# EAGLE board InteractionBoard_HallEffect (EAGLE 9.7.0)
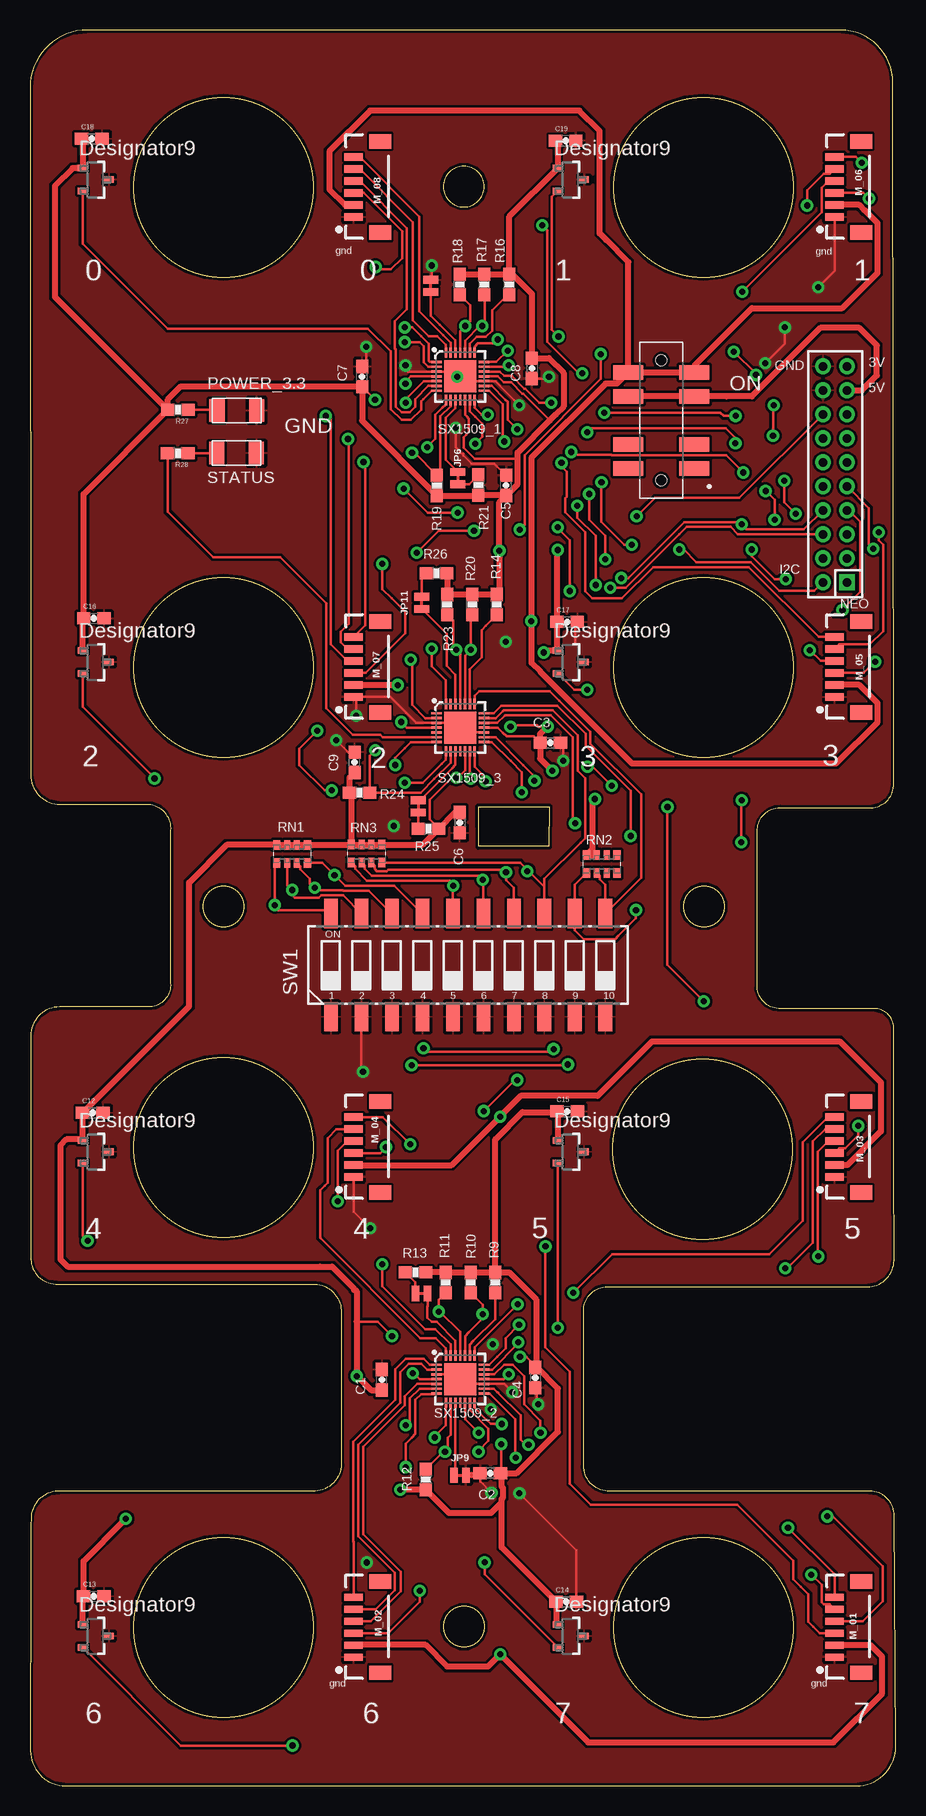
[diagram p0: board, top side]
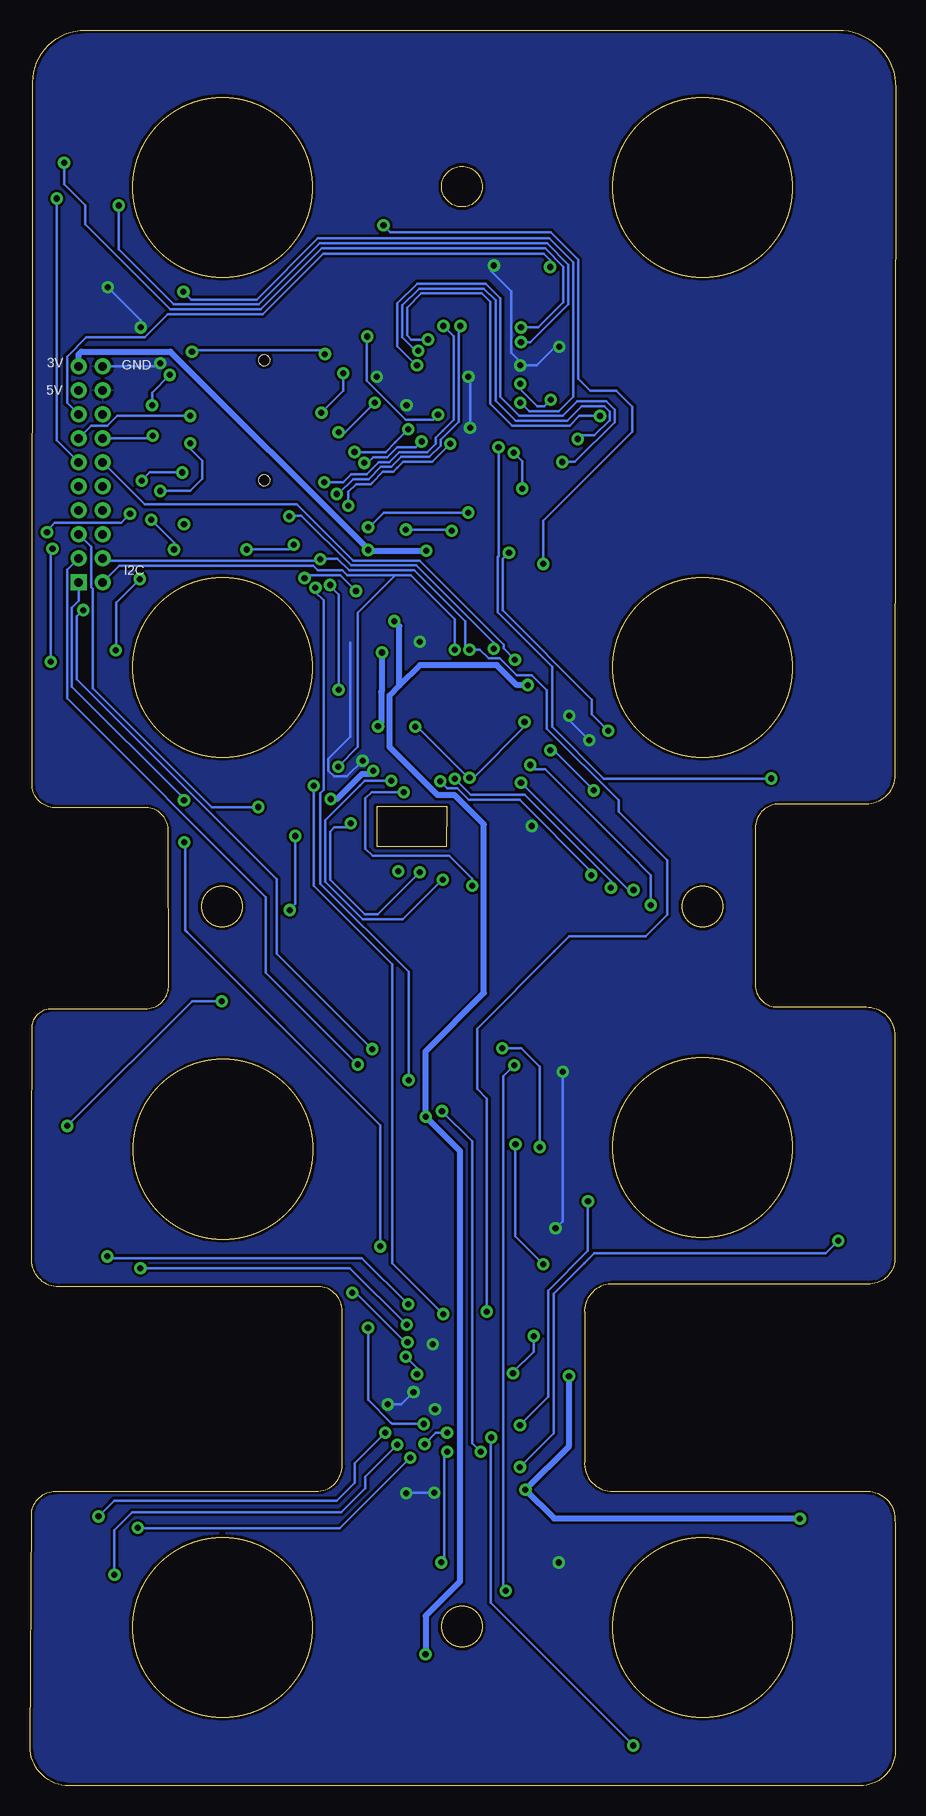
[diagram p1: board, bottom side, seen from below]

Size 72.14 x 146.32 mm. Coordinates in mm from the lower left corner, seen from the top.
Outline: 43.23,78.29 37.39,78.28 37.37,81.58 43.26,81.59 43.23,78.29
Outline: 71.97,63.21 arc87 70.33,64.77 62.38,64.77 arc-90 60.59,66.74 60.6,79.52 arc-90 62.48,81.52 70.1,81.51 arc90 71.96,83.5 71.9,141.95 arc90 67.53,146.32 4.8,146.32 arc90 0,141.51 0.06,84.23 arc90 2.49,81.8 9.88,81.8 arc-90 11.7,79.61 11.7,66.9 arc-90 10.02,64.9 2.46,64.9 arc90 0.06,62.5 0.06,43.87 arc90 2.34,41.81 23.74,41.81 arc-90 25.93,39.41 25.93,27.03 arc-90 23.77,24.54 2.57,24.54 arc88 0.09,22.48 0.05,21.53 0.05,10.47 0.03,10.09 0.03,2.92 arc90 2.96,0 68.89,0.01 arc90 72.14,3.28 72.01,22.7 arc90 69.81,24.54 48.12,24.54 arc-90 46.13,26.89 46.13,39.58 arc-90 48.11,41.58 69.76,41.58 arc90 72,43.79 72,47.47 71.99,47.79 71.99,52.59 71.98,52.95 71.98,57.82 71.97,58.14 71.97,63.21
Outline: 36.15,131.57 arc180 36.15,134.97 arc180 36.15,131.57
Outline: circle at 16.12,73.26 radius 1.7
Outline: circle at 36.16,13.27 radius 1.7
Outline: circle at 56.16,73.28 radius 1.7
Outline: circle at 16.12,13.2 radius 7.49
Outline: circle at 16.12,53.2 radius 7.49
Outline: circle at 16.12,133.2 radius 7.49
Outline: circle at 56.12,93.2 radius 7.49
Outline: circle at 56.12,133.2 radius 7.49
Outline: circle at 56.05,53.04 radius 7.49
Outline: circle at 16.12,93.2 radius 7.49
Outline: circle at 56.12,13.2 radius 7.49
Copper layers (1*16): Top / Bottom
Stack-up Default Layer Stack: Top User Defined 0.035mm / Dielectric-1 User Defined 1.5mm / Bottom User Defined 0.035mm
Design rules "SparkFun *": minimum track width 8mil, minimum drill 20mil, track to track 8mil, track to pad 8mil, pad to pad 8mil, via to via 8mil, smd to smd 8mil, copper to edge 10mil, drill to drill 8mil, minimum pad ring 12mil, minimum via ring 10mil, stop-mask expansion 4mil, vias tented up to drill 25mil, thermal gap 10mil
Net classes: 0 default: width 0.2 mm, clearance 0.2 mm; 1 gnd: width 0.3 mm, clearance 0.2 mm to class 0, clearance 0.2 mm; 2 3v: width 0.2 mm, clearance 0.2 mm; 4 5v: width 0.4 mm, clearance 0.2 mm to class 0, clearance 0.2 mm

## Footprints (pad centres in the part's own frame; a part is rotated, then mirrored left to right if it is on the bottom)
0603-CAP = smd 1.1 x 1: 1 -0.85,0; 2 0.85,0
DIL-2MM-2X10 = drill 0.711 square: 1 -9,-1 | drill 0.711: 2 -9,1; 3 -7,-1; 4 -7,1; 5 -5,-1; 6 -5,1; 7 -3,-1; 8 -3,1; 9 -1,-1; 10 -1,1; 11 1,-1; 12 1,1; 13 3,-1; 14 3,1; 15 5,-1; 16 5,1; 17 7,-1; 18 7,1; 19 9,-1; 20 9,1
SMT-JUMPER_2_NC_TRACE_NO-SILK = smd 0.635 x 1.27: 1 -0.508,0; 2 0.508,0
1X06-1MM = smd 0.6 x 1.55: 1 -2.54,1.27; 2 -1.54,1.27; 3 -0.54,1.27; 4 0.46,1.27; 5 1.46,1.27; 6 2.46,1.27 | smd 1.2 x 1.8: P$1 -3.84,-0.955; P$2 3.76,-0.955
LED1206FAB = smd 1.27 x 1.905: 1 -1.651,0; 2 1.651,0
0603-RES = smd 1.1 x 1: 1 -0.85,0; 2 0.85,0
EXB38V = smd 0.6 x 0.8: 1 -1.275,-0.75; 4 1.275,-0.75; 5 1.275,0.75; 8 -1.275,0.75 | smd 0.5 x 0.8: 2 -0.4,-0.75; 3 0.4,-0.75; 6 0.4,0.75; 7 -0.4,0.75
SW_JS207011SCQNR = smd 2.5 x 1.2: 1 -2.75,4; 2 -2.75,2; 3 -2.75,-2; 4 -2.75,-4; 5 2.75,4; 6 2.75,2; 7 2.75,-2; 8 2.75,-4 | hole 0.9: 0,5; 0,-5
CTS-219-10 = smd 1.13 x 2.44: 1 -11.43,-4.3; 2 -8.89,-4.3; 3 -6.35,-4.3; 4 -3.81,-4.3; 5 -1.27,-4.3; 6 1.27,-4.3; 7 3.81,-4.3; 8 6.35,-4.3; 9 8.89,-4.3; 10 11.43,-4.3; 11 11.43,4.3; 12 8.89,4.3; 13 6.35,4.3; 14 3.81,4.3; 15 1.27,4.3; 16 -1.27,4.3; 17 -3.81,4.3; 18 -6.35,4.3; 19 -8.89,4.3; 20 -11.43,4.3
QFN-28 = smd 0.85 x 0.2: 1 -1.975,1.2; 2 -1.975,0.8; 3 -1.975,0.4; 4 -1.975,0; 5 -1.975,-0.4; 6 -1.975,-0.8; 7 -1.975,-1.2; 15 1.975,-1.2; 16 1.975,-0.8; 17 1.975,-0.4; 18 1.975,0; 19 1.975,0.4; 20 1.975,0.8; 21 1.975,1.2 | smd 0.2 x 0.85: 8 -1.2,-1.975; 9 -0.8,-1.975; 10 -0.4,-1.975; 11 0,-1.975; 12 0.4,-1.975; 13 0.8,-1.975; 14 1.2,-1.975; 22 1.2,1.975; 23 0.8,1.975; 24 0.4,1.975; 25 0,1.975; 26 -0.4,1.975; 27 -0.8,1.975; 28 -1.2,1.975 | smd 2.65 x 2.65: 29 0,0
DBZ0003A_L = smd 0.8 x 0.55: 1 -1.1,0.95; 2 -1.1,-0.95; 3 1.1,0

## Placement (x,y rotation side)
C1  0.1uF  [0603-CAP]  29.32,33.83 90 top
C2  0.1uF  [0603-CAP]  38.35,26.05 180 top
C3  0.1uF  [0603-CAP]  43.36,86.91 0 top
C4  0.1uF  [0603-CAP]  42.11,34.01 270 top
C5  0.1uF  [0603-CAP]  39.67,108.37 90 top
C6  0.1uF  [0603-CAP]  35.8,80.26 270 top
C7  0.1uF  [0603-CAP]  27.68,117.43 90 top
C8  0.1uF  [0603-CAP]  41.83,118.12 270 top
C9  0.1uF  [0603-CAP]  27.05,85.29 90 top
C12  0.1uF  [0603-CAP]  5.23,56.09 0 top
C13  0.1uF  [0603-CAP]  5.31,15.79 0 top
C14  0.1uF  [0603-CAP]  44.69,15.33 0 top
C15  0.1uF  [0603-CAP]  44.77,56.19 0 top
C16  0.1uF  [0603-CAP]  5.32,97.29 0 top
C17  0.1uF  [0603-CAP]  44.76,96.99 0 top
C18  0.1uF  [0603-CAP]  5.14,137.25 0 top
C19  0.1uF  [0603-CAP]  44.64,137.09 0 top
J3  F-2X10-DIL-2MM  [DIL-2MM-2X10]  67.08,109.29 90 top
JP6  JUMPER-SMT_2_NC_TRACE_NO-SILK  [SMT-JUMPER_2_NC_TRACE_NO-SILK]  35.65,108.97 270 top
JP7  JUMPER-SMT_2_NC_TRACE_NO-SILK  [SMT-JUMPER_2_NC_TRACE_NO-SILK]  33.39,125 90 top
JP8  JUMPER-SMT_2_NC_TRACE_NO-SILK  [SMT-JUMPER_2_NC_TRACE_NO-SILK]  32.62,41.02 180 top
JP9  JUMPER-SMT_2_NC_TRACE_NO-SILK  [SMT-JUMPER_2_NC_TRACE_NO-SILK]  35.84,25.88 0 top
JP10  JUMPER-SMT_2_NC_TRACE_NO-SILK  [SMT-JUMPER_2_NC_TRACE_NO-SILK]  32.36,81.62 270 top
JP11  JUMPER-SMT_2_NC_TRACE_NO-SILK  [SMT-JUMPER_2_NC_TRACE_NO-SILK]  32.65,98.58 90 top
M_01  [1X06-1MM]  68.31,13.26 90 top
M_02  [1X06-1MM]  28.23,13.26 90 top
M_03  [1X06-1MM]  68.31,53.27 90 top
M_04  [1X06-1MM]  28.23,53.27 90 top
M_05  [1X06-1MM]  68.31,93.27 90 top
M_06  [1X06-1MM]  68.31,133.28 90 top
M_07  [1X06-1MM]  28.23,93.27 90 top
M_08  [1X06-1MM]  28.23,133.28 90 top
POWER_3.3  LEDFAB1206  [LED1206FAB]  17.24,114.61 0 top
R9  10K  [0603-RES]  38.78,41.93 90 top
R10  10K  [0603-RES]  36.74,41.93 90 top
R11  10K  [0603-RES]  34.66,41.93 90 top
R12  10K  [0603-RES]  32.97,25.52 270 top
R13  10K  [0603-RES]  32.13,42.8 0 top
R14  10K  [0603-RES]  38.9,98.43 90 top
R16  10K  [0603-RES]  39.94,125.1 90 top
R17  10K  [0603-RES]  37.86,125.11 90 top
R18  10K  [0603-RES]  35.81,125.1 90 top
R19  10K  [0603-RES]  33.91,108.37 270 top
R20  10K  [0603-RES]  36.84,98.43 90 top
R21  10K  [0603-RES]  37.37,108.4 270 top
R23  10K  [0603-RES]  34.75,98.43 90 top
R24  10K  [0603-RES]  27.47,82.76 180 top
R25  10K  [0603-RES]  33.21,79.76 0 top
R26  10K  [0603-RES]  33.89,101.05 0 top
R27  500  [0603-RES]  12.34,114.66 180 top
R28  500  [0603-RES]  12.31,111.04 180 top
RN1  [EXB38V]  21.84,77.65 0 top
RN2  [EXB38V]  47.64,76.81 0 top
RN3  [EXB38V]  28.04,77.68 0 top
S1  JS207011SCQNR  [SW_JS207011SCQNR]  52.61,113.78 180 top
STATUS  LEDFAB1206  [LED1206FAB]  17.21,111.06 0 top
SW1  219-10  [CTS-219-10]  36.51,68.38 0 top
SX1509_2  SX1509  [QFN-28]  35.85,33.89 0 top
SX1509_3  SX1509  [QFN-28]  35.85,88.18 0 top
U1  DRV5032FADBZRDBZ0003A_L  [DBZ0003A_L]  45.07,12.49 0 top
U2  SX1509  [QFN-28]  35.85,117.45 0 top
U3  DRV5032FADBZRDBZ0003A_L  [DBZ0003A_L]  5.48,52.84 0 top
U4  DRV5032FADBZRDBZ0003A_L  [DBZ0003A_L]  45.07,52.84 0 top
U5  DRV5032FADBZRDBZ0003A_L  [DBZ0003A_L]  5.48,12.49 0 top
U6  DRV5032FADBZRDBZ0003A_L  [DBZ0003A_L]  45.07,93.65 0 top
U7  DRV5032FADBZRDBZ0003A_L  [DBZ0003A_L]  5.48,133.85 0 top
U8  DRV5032FADBZRDBZ0003A_L  [DBZ0003A_L]  45.07,133.85 0 top
U9  DRV5032FADBZRDBZ0003A_L  [DBZ0003A_L]  5.48,93.65 0 top

## Library data of the parts
C1-C9 C12-C19 = SparkFun-Capacitors; PROD_ID: CAP-00810
J3 = con-headers-jp
JP6-JP11 = SparkFun-Jumpers
M_01-M_08 = SparkFun-Connectors; PROD_ID: CONN-08249; SF_ID: GPS-00579
POWER_3.3 STATUS = fab
R9-R14 R16-R21 R23-R28 = SparkFun-Resistors; PROD_ID: RES-00824
RN1-RN3 = resistor-dil; OC_FARNELL: unknown; OC_NEWARK: unknown
S1 = JS207011SCQNR; AVAILABILITY: Unavailable; DESCRIPTION: Slide Switch DP3T Surface Mount; MF: C&K; MP: JS207011SCQNR; PACKAGE: None; PRICE: None
SW1 = switch-dil; MF: SLI (CML/IDI); MPN: 219-10PK; OC_FARNELL: unknown; OC_NEWARK: 19M0224
SX1509_2 SX1509_3 U2 = SparkFun-DigitalIC; PROD_ID: IC-11311
U1 U3-U9 = 2023-08-01_17-56-42_Library; COPYRIGHT: Copyright (C) 2023 Ultra Librarian. All rights reserved.; DIGI-KEY_PART_NUMBER_1: 296-47765-1-ND; DIGI-KEY_PART_NUMBER_2: 296-47765-2-ND; DIGI-KEY_PART_NUMBER_3: 296-47765-6-ND; MANUFACTURER_PART_NUMBER: DRV5032FADBZR; MFR_NAME: Texas Instruments; REFDES: RefDes; TYPE: TYPE

## Nets
0_SX1: M_04.6 SX1509_2.27
0_SX2: M_08.6 U2.27
0_SX3: SX1509_3.27
1_SX1: M_04.5 SX1509_2.28
1_SX2: M_08.5 U2.28
1_SX3: J3.16 SX1509_3.28
2_SX1: M_02.6 SX1509_2.1
2_SX2: M_06.6 U2.1
2_SX3: SX1509_3.1
3.3V [3v]: C1.1 C2.1 C3.1 C4.1 C5.1 C6.1 C7.1 C8.1 C9.1 C12.1 C13.1 C14.1 C15.1 C16.1 C17.1 C18.1 C19.1 J3.19 R9.2 R10.2 R11.2 R12.2 R13.2 R14.2 R16.2 R17.2 R18.2 R19.2 R20.2 R21.2 R23.2 R24.2 R25.2 R26.2 R27.2 RN1.5 RN1.6 RN1.7 RN1.8 RN2.7 RN2.8 RN3.5 RN3.6 RN3.7 RN3.8 SX1509_2.4 SX1509_2.12 SX1509_2.18 SX1509_3.4 SX1509_3.12 SX1509_3.18 U1.1 U2.4 U2.12 U2.18 U3.1 U4.1 U5.1 U6.1 U7.1 U8.1 U9.1
3_SX1: M_02.5 SX1509_2.2
3_SX2: M_06.5 U2.2
3_SX3: J3.12 SX1509_3.2
4_SX1: M_02.4 SX1509_2.5
4_SX2: M_06.4 U2.5
4_SX3: SX1509_3.5
5_SX1: M_04.4 SX1509_2.6
5_SX2: M_08.4 U2.6
5_SX3: R28.2 SX1509_3.6
6_SX1: SX1509_2.7 U3.2
6_SX2: U2.7 U7.2
6_SX3: RN1.1 SW1.20 SX1509_3.7
7_SX1: SX1509_2.8 U5.2
7_SX2: U2.8 U9.2
7_SX3: RN1.2 SW1.19 SX1509_3.8
8_SX1: SX1509_2.13 U1.2
8_SX2: U2.13 U6.2
8_SX3: RN1.3 SW1.18 SX1509_3.13
9_SX1: SX1509_2.14 U4.2
9_SX2: U2.14 U8.2
9_SX3: RN1.4 SW1.17 SX1509_3.14
10_SX1: M_01.6 SX1509_2.15
10_SX2: M_05.6 U2.15
10_SX3: RN3.1 SW1.16 SX1509_3.15
11_SX1: M_01.5 SX1509_2.16
11_SX2: M_05.5 U2.16
11_SX3: RN3.2 SW1.15 SX1509_3.16
12_SX1: M_01.4 SX1509_2.19
12_SX2: M_05.4 U2.19
12_SX3: RN3.3 SW1.14 SX1509_3.19
13_SX1: M_03.6 SX1509_2.20
13_SX2: M_07.6 U2.20
13_SX3: RN3.4 SW1.13 SX1509_3.20
14_SX1: M_03.5 SX1509_2.21
14_SX2: M_07.5 U2.21
14_SX3: RN2.1 SW1.12 SX1509_3.21
15_SX1: M_03.4 SX1509_2.22
15_SX2: M_07.4 U2.22
15_SX3: RN2.2 SW1.11 SX1509_3.22
!RESET_SX1: R9.1 SX1509_2.23
!RESET_SX2: R16.1 U2.23
!RESET_SX3: R14.1 SX1509_3.23
ADDR0_SX1: JP8.1 SX1509_2.26
ADDR0_SX2: JP7.1 U2.26
ADDR0_SX3: JP11.1 SX1509_3.26
ADDR1_SX1: JP9.1 SX1509_2.10
ADDR1_SX2: JP6.1 U2.10
ADDR1_SX3: JP10.1 SX1509_3.10
GND_MCU: C1.2 C2.2 C3.2 C4.2 C5.2 C6.2 C7.2 C8.2 C9.2 C12.2 C13.2 C14.2 C15.2 C16.2 C17.2 C18.2 C19.2 J3.18 J3.20 JP7.2 JP9.2 M_01.1 M_02.1 M_03.1 M_04.1 M_05.1 M_06.1 M_07.1 M_08.1 POWER_3.3.2 STATUS.2 SW1.1 SW1.2 SW1.3 SW1.4 SW1.5 SW1.6 SW1.7 SW1.8 SW1.9 SW1.10 SX1509_2.3 SX1509_2.17 SX1509_2.29 SX1509_3.3 SX1509_3.17 SX1509_3.29 U1.3 U2.3 U2.17 U2.29 U3.3 U4.3 U5.3 U6.3 U7.3 U8.3 U9.3
INT_01: J3.6 R12.1 SX1509_2.9
INT_02: J3.8 R19.1 U2.9
INT_03: J3.14 R24.1 SX1509_3.9
N$5: JP6.2 R21.1
N$8: JP8.2 R13.1
N$13: R28.1 STATUS.1
N$14: JP10.2 R25.1
N$15: JP11.2 R26.1
N$193: POWER_3.3.1 R27.1
NEOPIXEL_01: J3.1 M_01.3
NEOPIXEL_02: J3.3 M_02.3
NEOPIXEL_03: J3.5 M_03.3
NEOPIXEL_04: J3.7 M_04.3
NEOPIXEL_05: J3.9 M_05.3
NEOPIXEL_06: J3.11 M_06.3
NEOPIXEL_07: J3.13 M_07.3
NEOPIXEL_08: J3.15 M_08.3
OSCIO_SX1: SX1509_2.11
OSCIO_SX2: U2.11
OSCIO_SX3: SX1509_3.11
RESET: J3.10
SCL_00: J3.4 R11.1 R18.1 R23.1 SX1509_2.25 SX1509_3.25 U2.25
SDA_00: J3.2 R10.1 R17.1 R20.1 SX1509_2.24 SX1509_3.24 U2.24
VCC_5V [5v]: M_01.2 M_02.2 M_03.2 M_04.2 M_05.2 M_06.2 M_07.2 M_08.2 S1.4 S1.8
VCC_5V_IN [5v]: J3.17 S1.3 S1.7

## Tracks (layer width: path | path; a pad name or v marks a point on that pad's centre or on a via)
0_SX1  (via drill 0.51)
  Top 0.203: SX1509_2.27 35.05,36.79 33.79,38.06 32.94,38.06 29.37,41.63 v29.37,43.47 | v31.69,53.46 29.42,55.73 M_04.6
  Bottom 0.203: v29.37,43.47 31.69,45.79 v31.69,53.46
0_SX2
  Top 0.203: M_08.6 27.47,135.74 32.45,130.76 32.45,124.05 32.45,122.87 34.43,120.89 35.05,120.27 U2.27
1_SX1
  Top 0.203: M_04.5 25.54,54.73 24.79,53.98 24.79,50.24 24.54,49.99 24.17,49.61 24.17,48.78 24.17,45.66 24.21,45.62 32.52,37.3 33.83,37.3 34.65,36.48 SX1509_2.28
1_SX2
  Top 0.203: M_08.5 27.47,134.74 31.91,130.3 31.91,124.01 31.91,122.13 33.24,120.8 33.93,120.8 34.65,120.08 U2.28
1_SX3  (via drill 0.51)
  Top 0.203: v50.55,105.78 52.09,107.33 56.64,107.33 59.12,107.33 J3.16 | SX1509_3.28 34.65,92.14 33.49,93.3 v33.49,94.76
  Bottom 0.203: v50.55,105.78 50.49,105.84 49.53,105.84 45.39,101.7 39.96,101.7 33.49,95.24 v33.49,94.76
2_SX1
  Top 0.203: M_02.6 26.96,20.34 26.95,20.35 26.95,28.67 30.43,32.16 30.43,34.18 30.43,34.71 31.32,35.59 32.8,35.59 33.3,35.09 SX1509_2.1
2_SX2  (via drill 0.51)
  Top 0.203: v69.3,135.24 68.81,135.74 M_06.6 | U2.1 33.33,118.65 33.21,118.77 33.21,120.18 32.6,120.79 31.86,121.53 v31.23,121.53
  Bottom 0.203: v69.3,135.24 69.3,133.47 67.55,131.72 67.55,130.12 60.47,123.04 52.93,123.04 47.84,128.13 29.21,128.13 27.69,126.6 27.69,123.64 29.8,121.53 v31.23,121.53
3.3V  (via drill 0.51)
  Top 0.203: SX1509_3.18 38.98,88.18 39.38,87.77 39.71,87.44 41.98,87.44 C3.1 | SX1509_2.12 36.25,30.56 v37.39,29.42 | v39.26,28.48 39.26,26.11 C2.1 | SX1509_3.12 36.25,85.07 36.25,84.64 35.61,84 | U2.18 38.42,117.45 38.73,117.45 38.97,117.45 39.47,116.96 40.09,116.96 41.03,116.01 41.09,116.01 43.31,113.79 | SX1509_2.4 32.47,33.89 31.9,34.46 v31.9,34.38 | v30.17,37.48 28.96,38.68 27.22,38.68 | SX1509_2.18 39.09,33.89 39.48,33.89 v39.89,34.3 | v40.83,35.74 41.35,35.74 42.17,34.92 | R25.2 33.3,80.53 33.3,82.17 35.13,84 35.61,84 | v40.04,88.26 40.17,88.39 42.26,88.39 42.39,88.26 43.12,88.26 v43.14,88.28 | U2.4 31.73,117.45 31.11,116.84 v31.29,116.84 | v28.75,115.5 C7.1 | U2.12 36.25,114.26 36.4,114.12 36.58,113.93 36.58,113.03 36.58,112.8 36.35,112.57 36.16,112.37 36.16,111.51 37.06,110.6 37.19,110.6 39.18,110.6 40.58,110.6 40.63,110.65 | SX1509_3.4 31.41,88.18 v30.94,88.65 | 35.61,84 v35.52,84
  Top 0.508: U1.1 43.84,13.57 C14.1 39.31,19.86 39.31,23.63 | U5.1 4.38,15.72 C13.1 4.46,18.73 7.78,22.05 v7.98,22.25 | 43.97,56.14 C15.1 | 43.97,56.14 U4.1 | R18.2 37.85,125.95 R17.2 39.93,125.96 R16.2 39.94,126.21 | C19.1 43.97,136.91 U8.1 39.94,130.78 39.94,126.21 | C18.1 4.38,137.16 U7.1 3.55,134.8 2.08,133.33 2.08,124.07 R27.2 | U9.1 4.38,97.2 C16.1 4.47,107.65 R27.2 | C9.1 26.62,84.01 R24.2 26.77,82.62 RN3.8 | RN3.8 26.74,78.4 RN1.5 RN1.6 RN1.7 RN1.8 16.38,78.4 13.25,75.27 13.25,64.96 C12.1 U3.1 4.31,53.86 3.04,53.86 2.52,53.34 2.52,43.87 3.14,43.26 24.16,43.26 25.19,43.26 27.02,41.43 27.02,41.31 27.13,41.31 | RN3.8 RN3.7 RN3.6 RN3.5 32.73,78.43 R25.2 35.41,81.11 C6.1 | RN2.7 RN2.8 46.87,78.06 46.87,82.03 v47.08,82.24 | R9.2 R10.2 R11.2 34.63,42.8 R13.2 | R9.2 39.93,42.78 42.17,40.54 42.17,34.92 | 42.17,34.92 C4.1 | C2.1 39.31,26.05 | 39.31,26.05 40.55,26.05 43.99,29.49 43.99,33.1 42.17,34.92 | 39.31,23.63 38.4,22.72 34.92,22.72 R12.2 30.89,24.67 30.88,24.65 v30.86,24.67 | R9.2 38.78,53.88 38.8,53.9 41.04,56.14 43.97,56.14 | R27.2 11.49,115.54 12.57,116.62 27.63,116.62 C7.1 27.68,113.76 R19.2 37.34,107.52 R21.2 39.64,107.55 C5.1 | R20.2 R23.2 34.75,101.04 R26.2 | R20.2 R14.2 39.12,99.5 v39.12,102.92 39.12,106.96 C5.1 | R20.2 | 39.94,126.21 41.83,124.32 41.83,119.15 41.83,119.12 C8.1 43.24,118.97 44.47,117.75 44.47,114.93 43.83,114.29 43.82,114.29 43.31,113.79 40.63,111.1 40.63,110.65 40.63,108.47 C5.1 | 27.13,41.31 27.22,41.22 27.22,38.68 v27.22,34.14 27.26,34.14 28.42,32.98 C1.1 | 27.13,41.31 27.14,41.3 | v30.86,24.67 | v42.81,94.44 42.97,94.6 U6.1 43.91,94.66 C17.1 43.91,102.96 43.94,102.99 v43.97,102.99
  Top 0.508: 39.31,23.63 39.31,23.9 39.42,24.01 39.42,24.81 39.31,24.92 39.31,26.05 | C3.1 42.77,87.17 | C3.1 42.51,85.6 v43.54,84.58 | C3.1 42.51,87.66 43.12,88.26
  Bottom 0.203: v37.39,29.42 38.32,29.42 v39.26,28.48 | v30.17,37.48 30.17,36.19 31.9,34.46 v31.9,34.38 | v40.04,88.26 39.88,88.26 35.71,84.09 | 35.71,84.09 35.61,84 v35.52,84 | v31.29,116.84 31.29,116.39 29.87,114.97 29.28,114.97 v28.75,115.5 | v30.94,88.65 30.94,88.23 35.08,84.09 35.71,84.09 | v39.89,34.3 39.89,34.8 v40.83,35.74
  Bottom 0.508: v39.12,102.92 43.86,102.92 43.92,102.99 | v39.12,102.92 | J3.19 68.08,119.28 67.86,119.51 60.44,119.51 43.92,102.99 | v7.98,22.25 v7.98,22.26 8,22.28 28.46,22.28 v30.86,24.67 27.22,28.31 v27.22,34.14 | 43.92,102.99 v43.97,102.99 | v47.08,82.24 46.55,82.24 44.46,84.32 43.79,84.32 v43.54,84.58 | v42.81,94.44 42.81,91.24 42.89,91.17 42.89,88.54 v43.14,88.28
3_SX1
  Top 0.203: SX1509_2.2 33.11,34.69 32.61,35.19 31.56,35.19 30.84,34.47 30.84,31.91 27.36,28.42 27.36,20.79 30.39,17.75 30.39,16.3 28.82,14.72 M_02.5
3_SX2  (via drill 0.51)
  Top 0.203: M_06.5 66.65,134.34 66.14,134.34 64.76,132.96 v64.76,131.69 | U2.2 33.17,118.25 32.8,118.63 32.8,119.98 32.47,120.31 v31.23,120.31
  Bottom 0.203: 31.23,128.55 31.32,128.55 31.36,128.55 | v64.76,131.69 64.76,128.03 60.18,123.45 53.09,123.45 47.99,128.55 31.23,128.55 | v31.23,120.31 30.44,120.31 27.28,123.47 27.28,126.77 29.06,128.55 31.23,128.55
3_SX3  (via drill 0.51)
  Top 0.203: SX1509_3.2 32.95,88.98 31.84,90.09 31.84,93.73 v31.73,93.84
  Bottom 0.203: J3.12 62.58,106.79 49.9,106.79 45.22,102.11 39.68,102.11 32.68,95.1 32.68,94.78 v31.73,93.84
4_SX1
  Top 0.203: SX1509_2.5 32.29,33.49 31.25,32.44 31.25,31.72 27.76,28.24 27.76,20.95 30.88,17.83 30.88,16.21 28.39,13.72 M_02.4
4_SX2  (via drill 0.51)
  Top 0.203: v59.36,124.5 65.96,131.11 65.96,133.16 66.54,133.74 M_06.4 | U2.5 32.83,117.05 31.23,115.45 31.23,115.33 v31.3,115.26
  Bottom 0.203: v59.36,124.5 58.71,123.85 53.26,123.85 48.16,128.96 28.89,128.96 26.87,126.94 26.87,115.77 28.08,114.57 30.52,114.57 31.22,115.26 v31.3,115.26
5_SX1  (via drill 0.51)
  Top 0.203: M_04.4 26.46,53.73 25.65,52.92 v25.65,48.71 | SX1509_2.6 32.47,33.09 31.65,32.28 31.65,30.4 v31.31,30.05
  Bottom 0.203: v25.65,48.71 25.65,44.59 28.96,41.27 28.96,32.42 31.31,30.07 v31.31,30.05
5_SX2
  Top 0.203: M_08.4 27.47,133.74 31.41,129.79 31.41,123.03 30.41,122.04 30.41,119.76 30.48,119.7 30.48,114.93 30.96,114.44 31.64,114.44 32.11,114.92 32.11,115.56 33.21,116.65 U2.6
5_SX3
  Top 0.203: SX1509_3.6 29.41,87.38 29.19,87.59 26.88,87.59 24.67,89.8 24.67,98.56 20.86,102.38 15.28,102.38 11.46,106.19 R28.2
6_SX1  (via drill 0.51)
  Top 0.203: v31.31,26.56 31.31,28.51 31.82,29.02 32.12,29.32 32.12,32.14 32.12,32.17 32.59,32.63 33.82,32.63 SX1509_2.7 | v4.8,45.41 4.38,45.83 U3.2
  Bottom 0.203: v31.31,26.56 28.51,29.37 28.51,40.15 28.51,41 25.96,43.55 25.11,44.4 6.37,44.4 5.82,44.4 v4.8,45.41
6_SX2
  Top 0.203: U7.2 4.38,128.52 11.47,121.44 28.17,121.44 30.07,119.53 30.07,114.72 30.97,113.82 31.46,113.82 31.73,113.82 32.59,114.69 32.59,115.38 32.76,115.55 33.46,116.25 U2.7
6_SX3  (via drill 0.51)
  Top 0.203: SW1.20 24.79,72.97 20.66,72.97 20.26,73.37 20.28,73.39 v20.41,73.39 20.41,76.74 RN1.1 | SX1509_3.7 33.29,86.98 | 33.29,86.98 33.15,86.98 | v30.44,85.06 30.44,85.68 31.24,86.48 31.74,86.98 33.29,86.98
  Bottom 0.203: v20.41,73.39 20.41,75.9 22.29,77.79 29.21,84.7 30.08,84.7 v30.44,85.06
7_SX1  (via drill 0.51)
  Top 0.203: SX1509_2.8 34.65,30.03 33.66,29.04 33.67,29.02 v33.72,29.02 | v21.87,3.36 12.57,3.36 U5.2
  Bottom 0.203: v21.87,3.36 21.87,3.36 33.75,15.25 33.75,28.99 v33.72,29.02
7_SX2  (via drill 0.51)
  Top 0.203: v10.38,83.94 4.38,89.94 U9.2 | U2.8 34.65,115.1 34.37,114.82 33.78,114.24 33.78,113.83 33.78,112.24 v33.1,111.56
  Bottom 0.203: v10.38,83.94 24.32,83.94 28.63,88.25 28.63,93.25 33.15,97.78 33.15,102.4 33.1,102.46 v33.1,111.56
7_SX3  (via drill 0.51)
  Top 0.203: RN1.2 21.44,75.06 v21.85,74.65 21.85,74.22 22.05,74.01 24.07,74.01 24.26,74.21 25.91,74.21 25.92,74.2 26.1,74.2 SW1.19 | SX1509_3.8 34.65,85.5 34.33,85.17 32.74,83.58 v31.22,83.58
  Bottom 0.203: v31.22,83.58 22.29,74.65 v21.85,74.65
8_SX1  (via drill 0.51)
  Top 0.203: v37.88,18.61 37.88,17.63 U1.2 | v37.38,27.84 37.38,27.92 38.2,28.74 38.2,29.77 36.65,31.32 SX1509_2.13
  Bottom 0.203: v37.88,18.61 37.64,18.85 37.64,27.58 v37.38,27.84
8_SX2  (via drill 0.51)
  Top 0.203: v45.62,106.68 45.62,105.69 47.14,104.17 v47.14,100.07 | v46.43,91.33 45.34,91.33 U6.2 | U2.13 36.65,114.53 37.11,114.07 37.68,113.5 37.68,113.35 37.68,112.4 v37.11,111.83
  Bottom 0.203: v46.43,91.33 46.43,99.26 47.14,99.96 v47.14,100.07 | v45.62,106.68 45.62,107.83 44.97,108.47 43.76,108.47 43.64,108.59 42.73,109.49 42.54,109.49 41.86,109.49 41.52,109.83 41.02,110.33 39.83,110.33 38.61,110.33 v37.11,111.83
8_SX3  (via drill 0.51)
  Top 0.203: RN1.3 22.51,76.63 22.51,76.38 23.32,75.57 23.32,75.16 | 23.32,75.16 23.86,74.61 26.08,74.61 26.09,74.6 28.24,74.6 SW1.18 | SX1509_3.13 36.65,83.85 36.66,83.85 v36.74,83.93 | 23.32,75.16 23.4,75.16 v23.73,74.83
  Bottom 0.203: v36.74,83.93 35.4,82.59 30.92,82.59 23.73,75.4 v23.73,74.83
9_SX1  (via drill 0.51)
  Top 0.203: U4.2 43.97,38.24 44.01,38.2 v43.97,38.16 | SX1509_2.14 37.05,31.48 38.04,30.5 38.39,30.15 v39.32,30.15
  Bottom 0.203: v43.97,38.16 43.97,32.15 42.07,30.25 41.97,30.15 v39.32,30.15
9_SX2  (via drill 0.51)
  Top 0.203: U2.14 37.05,114.85 37.65,114.25 v38.14,114.25 | v44.04,120.77 43.5,121.32 43.5,132.43 U8.2
  Bottom 0.203: v44.04,120.77 44.06,120.75 44.06,117.07 40.84,113.85 38.55,113.85 v38.14,114.25
9_SX3  (via drill 0.51)
  Top 0.203: 25.1,76.16 24.37,76.9 RN1.4 | SW1.17 30.37,75.01 26.26,75.01 25.1,76.16 | SX1509_3.14 37.05,84.91 37.69,84.28 37.96,84.01 v37.96,83.7 | 25.1,76.16 | v25.37,75.89 25.1,76.16
  Bottom 0.203: v37.96,83.7 37.37,83.11 36.52,83.11 35.57,82.17 31.35,82.17 25.37,76.19 v25.37,75.89
10_SX1  (via drill 0.51)
  Top 0.203: v63.16,21.5 67.04,17.62 M_01.6 | SX1509_2.15 38.3,32.69 40.45,30.54 40.45,28.82 40.45,27.35 v40.47,27.33
  Bottom 0.203: v63.16,21.5 63.16,21.47 46.33,21.47 v40.47,27.33
10_SX2  (via drill 0.51)
  Top 0.203: M_05.6 65.71,95.73 59.89,101.55 51.93,101.55 49.32,98.95 46.84,98.95 46.26,99.53 46.26,104.47 44.6,106.13 44.6,107.3 44.75,107.44 44.75,109.51 44.29,109.97 v44.29,110.24 | U2.15 38.27,116.25 39.4,115.12 39.4,112.14 v39.51,112.03
  Bottom 0.203: v39.51,112.03 39.99,111.55 41.53,111.55 42.37,110.71 43.54,110.71 44.02,110.24 v44.29,110.24
10_SX3  (via drill 0.51)
  Top 0.203: SW1.16 35.24,75.1 35.28,75.14 | RN3.1 27.09,76.61 27.09,76.41 28.08,75.41 35,75.41 35.28,75.14 | 35.28,75.14 v35.28,75.01 | SX1509_3.15 38.49,86.98 40.06,85.41 40.99,84.47 v40.99,82.8
  Bottom 0.203: v40.99,82.8 43.66,82.8 44.18,82.28 44.18,78.1 43.59,77.5 37.19,77.5 35.28,75.59 v35.28,75.01
11_SX1  (via drill 0.51)
  Top 0.203: M_01.5 66.65,15.12 66.14,15.12 65.96,15.3 65.96,16.74 v65.11,17.6 | SX1509_2.16 38.37,33.09 38.65,33.09 38.93,32.81 | 38.93,32.81 39.01,32.73 | 38.93,32.81 40.88,30.86 40.88,28.83 41.54,28.17 41.54,28.18 v41.54,28.41
  Bottom 0.203: v65.11,17.6 65.11,21.29 63.61,22.79 46.22,22.79 44.19,24.82 44.19,25.76 v41.54,28.41
11_SX2  (via drill 0.51)
  Top 0.203: v59.44,109.44 59.44,109.47 58.04,110.88 48.48,110.88 48.45,110.91 45.34,110.91 v45.1,111.15 | v62.84,108.76 62.84,106.96 v63.81,105.99 | M_05.5 67.42,95.11 69.97,95.11 71.08,96.22 71.08,103.43 70.73,103.78 v70.73,104.47 | U2.16 38.28,116.65 38.48,116.65 39.62,115.51 39.8,115.33 39.8,114.98 39.8,113.86 40.62,113.04 v40.62,113.04
  Bottom 0.203: v59.44,109.44 62.16,109.44 v62.84,108.76 | v63.81,105.99 64.52,105.27 70.07,105.27 70.8,104.54 v70.73,104.47 | v40.62,113.04 41.69,111.96 41.7,111.96 42.51,111.15 v45.1,111.15
11_SX3  (via drill 0.51)
  Top 0.203: SW1.15 37.78,74.97 37.78,75.53 | RN3.2 27.89,76.69 27.89,76.41 28.47,75.82 37.49,75.82 37.78,75.53 | v42.04,83.76 42,83.76 42,84.18 41.11,85.06 38.8,87.38 38.38,87.38 SX1509_3.16 | 37.78,75.53 37.75,75.53 v37.74,75.52
  Bottom 0.203: v37.74,75.52 37.79,75.52 41.09,72.22 44.41,72.22 47.53,75.34 47.53,80.46 44.66,83.33 44.23,83.76 v42.04,83.76
12_SX1  (via drill 0.51)
  Top 0.203: v66.43,22.45 66.92,22.45 71.08,18.28 71.08,15.41 71.06,15.39 69.39,13.72 M_01.4 | SX1509_2.19 38.71,34.29 39.53,35.11 40.23,35.11 41.19,34.15 41.19,31.78 42.54,30.43 v42.54,29.41
  Bottom 0.203: v66.43,22.45 66.39,22.48 65.1,23.77 53.15,23.77 46.57,23.77 45.07,25.27 45.07,26.88 v42.54,29.41
12_SX2  (via drill 0.51)
  Top 0.203: U2.19 38.94,117.85 39.15,117.85 39.52,117.49 40.13,117.49 41.2,116.42 41.26,116.42 42.42,115.25 v43.43,115.25 | v46.43,112.79 46.43,112.83 46.73,113.13 57.98,113.13 58.79,112.33 v58.79,111.87 | v61.3,107.9 62.05,107.15 v62.05,105.51 | v64.99,94.63 65.88,93.73 M_05.4 | v62.99,100.56 62.05,100.56 60.14,102.47 v60.14,103.03 | v62.05,105.51
  Bottom 0.203: v46.43,112.79 46.43,112.81 45.87,112.81 v43.43,115.25 | v58.79,111.87 58.79,111.42 57.79,110.41 57.79,108.9 58.78,107.9 61.21,107.9 v61.3,107.9 | v62.99,100.56 64.97,98.58 64.97,94.65 v64.99,94.63 | v62.05,105.51 60.14,103.6 v60.14,103.03
12_SX3  (via drill 0.51)
  Top 0.203: SW1.14 40.32,74.82 39.67,75.47 39.67,76.14 | RN3.3 28.71,76.66 28.71,76.41 28.89,76.23 29.75,76.23 29.85,76.33 39.48,76.33 39.67,76.14 | SX1509_3.19 38.59,88.58 38.95,88.58 39.55,89.17 39.58,89.21 43.4,89.21 45.24,87.37 45.24,80.39 v45.42,80.21 | v39.67,76.12 39.67,76.14
  Bottom 0.203: v39.67,76.12 39.68,76.12 43.18,72.63 44.24,72.63 47.13,75.51 47.13,79.52 46.77,79.88 45.75,79.88 v45.42,80.21
13_SX1  (via drill 0.51)
  Top 0.203: v45.28,41.09 48.51,44.31 61.6,44.31 64.38,47.1 64.38,53.62 66.49,55.73 M_03.6 | SX1509_2.20 38.5,34.69 40.68,36.87 v40.68,36.96
  Bottom 0.203: v45.28,41.09 45,41.09 40.88,36.96 v40.68,36.96
13_SX2  (via drill 0.51)
  Top 0.203: v27.79,110.32 27.92,110.19 27.92,96.69 M_07.6 | U2.20 39.77,118.25 v39.89,118.37
  Bottom 0.203: v39.89,118.37 39.96,118.37 41.53,119.95 41.53,123.53 39.88,125.18 34.14,125.18 32.94,123.97 32.94,115.74 31.35,114.16 27.76,114.16 26.55,115.37 24.14,115.37 23.42,114.66 23.42,113.65 26.75,110.32 v27.79,110.32
13_SX3  (via drill 0.51)
  Top 0.203: SW1.13 42.86,74.92 | 42.86,74.92 41.29,76.48 | 41.29,76.48 41.44,76.33 v41.44,76.21 | RN3.4 40.84,76.93 41.29,76.48 | 42.86,74.92 42.86,75.57 45.88,78.6 46.26,78.98 46.26,83.97 45.65,84.58 45.65,87.54 43.57,89.62 39.47,89.62 39.39,89.55 38.83,88.98 38.42,88.98 SX1509_3.20
14_SX1  (via drill 0.51)
  Top 0.203: M_03.5 66.27,54.73 65.23,53.69 65.23,45.25 63.12,43.14 v62.94,43.14 | SX1509_2.21 38.27,35.09 38.92,35.74 39.65,36.47 39.65,37.29 39.65,37.31 v40.75,38.41
  Bottom 0.203: v40.75,38.41 45.48,43.14 v62.94,43.14
14_SX2  (via drill 0.51)
  Top 0.203: M_07.5 26.46,94.73 25.88,95.31 25.88,96.16 26.57,96.85 26.57,112.17 v26.5,112.23 | U2.21 38.86,118.65 v39.8,119.59
  Bottom 0.203: v26.5,112.23 26.19,112.54 25.1,112.54 23.83,113.81 23.83,114.49 24.31,114.96 26.15,114.96 27.36,113.75 31.67,113.75 33.34,115.42 33.34,123.8 34.31,124.77 39.71,124.77 41.13,123.36 41.13,120.71 40.01,119.59 v39.8,119.59
14_SX3  (via drill 0.51)
  Top 0.203: RN2.1 45.4,75.09 SW1.12 45.4,71.28 46.13,70.55 48.76,70.55 49.04,70.83 50.5,72.29 v50.5,72.98 | v50.05,79.15 50.05,82.94 46.3,86.69 46.3,87.68 43.96,90.02 39.3,90.02 39.29,90 38.66,89.38 SX1509_3.21
  Bottom 0.203: v50.05,79.15 50.05,73.5 50.53,73.01 v50.5,72.98
15_SX1  (via drill 0.51)
  Top 0.203: SX1509_2.22 37.05,36.55 v40.63,40.12 | M_03.4 66.54,53.73 65.64,52.83 65.64,44.18 v65.7,44.11
  Bottom 0.203: v40.63,40.12 44.48,43.97 65.56,43.97 v65.7,44.11
15_SX2  (via drill 0.51)
  Top 0.203: v24.64,114.15 24.94,114.15 25.08,114.01 25.08,95.11 26.46,93.73 M_07.4 | U2.22 37.05,119.94 37.32,120.2 37.33,120.21 37.9,120.21 38.67,120.21 v38.98,120.52
  Bottom 0.203: v38.98,120.52 40.36,120.52 40.72,120.88 40.72,123.19 39.54,124.37 34.48,124.37 33.77,123.66 33.77,115.17 31.94,113.35 27.17,113.35 26.37,114.15 v24.64,114.15
15_SX3
  Top 0.203: RN2.2 47.49,75.82 47.49,75.54 47.94,75.09 SW1.11 50.94,75.68 50.94,82.62 46.7,86.86 46.7,87.85 44.12,90.43 43.33,91.23 37.45,91.23 37.05,90.83 SX1509_3.22
!RESET_SX1
  Top 0.203: SX1509_2.23 36.65,36.77 36.95,37.07 38.78,38.9 R9.1
!RESET_SX2
  Top 0.203: U2.23 36.65,120.05 36.65,120.18 37.22,120.75 37.99,120.75 38.5,121.27 38.5,122.95 39.81,124.25 R16.1
!RESET_SX3
  Top 0.203: SX1509_3.23 36.65,91.94 36.65,93.07 37.64,94.05 37.64,96.32 38,96.68 R14.1
ADDR0_SX1
  Top 0.203: SX1509_2.26 35.45,37.09 33.89,38.66 33.49,38.66 33.12,39.02 33.12,39.96 33.13,39.97 JP8.1
ADDR0_SX2
  Top 0.203: JP7.1 33.39,122.51 34.15,121.75 35.45,120.45 U2.26
ADDR0_SX3
  Top 0.203: SX1509_3.26 35.45,92.59 34.71,93.33 34.71,96.02 JP11.1
ADDR1_SX1
  Top 0.203: SX1509_2.10 35.45,26.01 JP9.1
ADDR1_SX2
  Top 0.203: JP6.1 35.65,109.5 34.66,110.49 34.66,113.99 35.45,114.79 U2.10
ADDR1_SX3
  Top 0.203: SX1509_3.10 35.45,85.07 35.19,84.81 35.18,84.81 32.51,82.13 JP10.1
GND_MCU  (via drill 0.51)
  Top 0.203: v40.79,24.39 45.54,19.64 C14.2 | M_04.1 26.96,47.84 v28.35,46.45 | v27.75,59.52 27.62,59.65 SW1.2 | M_06.1 67.04,126.25 v65.67,124.88 | v62.91,121.53 62.91,120.17 v61.28,118.54 | 45.44,95.27 45.44,96.82 C17.2 | C2.2 37.5,25.36 v38.45,24.41 | v28.03,119.91 28.03,118.63 C7.2 | v33.48,126.69 33.48,125.6 JP7.2 | SX1509_3.17 36.25,87.78 SX1509_3.29 35.45,88.58 SX1509_3.3 32.19,88.58 31.34,89.43 30.7,90.07 30.04,90.73 M_07.1 27.2,90.5 v27.2,89.16 | SX1509_2.3 35.45,34.29 SX1509_2.29 36.25,33.49 SX1509_2.17 39.51,33.49 v40.19,32.81 | U2.17 36.25,117.05 35.88,117.43 | 35.88,117.43 U2.29 35.45,117.85 U2.3 31.5,117.85 31.29,118.07 v31.29,118.36 | C4.2 42.25,33.02 42.25,31.87 v42.34,31.78 | C5.2 38.7,110.19 36.81,110.19 36.1,110.9 | 36.1,110.9 36.1,110.99 36.07,111.02 | 36.1,110.9 35.47,111.53 v35.47,113.16 | U2.17 38.51,117.05 | v43.25,117.43 43.1,117.27 C8.2 | C3.2 44.42,86.7 v44.42,85.42 v44.43,85.41 | 35.88,117.43 v35.61,117.43 | U2.17 38.77,117.05 v40.77,115.06 | C9.2 26.51,86.14 v25.53,87.12
  Top 0.508: C2.2 37.34,25.88 JP9.2
  Bottom 0.203: v40.79,24.39 40.76,24.41 v38.45,24.41 | v28.35,46.45 27.75,47.05 27.75,59.29 v27.75,59.52 | v65.67,124.88 62.91,122.12 v62.91,121.53 | v61.28,118.54 61.53,118.29 J3.20 | 30.99,118.36 29.92,118.36 28.37,119.91 v28.03,119.91 | v33.48,126.69 33.48,126.6 33.76,126.25 32.04,124.54 32.04,119.41 30.99,118.36 | v35.47,113.16 35.47,117.01 35.61,117.15 v35.61,117.43 | 30.99,118.36 | v31.29,118.36 30.99,118.36 | v40.19,32.81 41.22,31.78 v42.34,31.78 | v44.43,85.41 45.73,84.11 46.8,84.11 47.27,84.59 47.27,85.6 45.44,87.43 45.44,95.27 | v25.53,87.12 27.2,88.79 v27.2,89.16
  other vias: 30.32,79.98 28.07,18.6 38.57,36.81 38.39,31.38 39.65,95.33
  pour Top (isolate 0.005): 84.38,155.92 -8.56,155.92 -8.56,-4.46 84.38,-4.46
  pour Bottom (isolate 0.005): 72.32,147.58 -0.84,147.58 -0.84,-0.05 72.32,-0.05
INT_01  (via drill 0.51)
  Top 0.203: SX1509_2.9 35.05,29.91 35.05,29.27 34.8,29.02 34.8,28.06 v34.58,27.84 34.44,27.84 R12.1 | v37.81,56.23 40.39,58.81 40.56,58.81 v40.59,58.81 | v48.36,99.83 48.93,99.83 49.63,99.83 54.09,104.29 54.71,104.91 58.25,104.91 58.39,104.91 58.99,104.31 59.01,104.29 J3.6
  Bottom 0.203: v34.58,27.84 35.31,28.56 35.31,53.73 v37.81,56.23 | v48.36,99.83 48.36,99.47 47.68,98.79 47.68,84.42 47.67,84.41 47.67,82.99 47.94,82.72 47.94,75.17 40.59,67.83 v40.59,58.81
INT_02  (via drill 0.51)
  Top 0.203: v31.13,108.1 33.13,106.1 v35.63,106.1 | v44.98,99.56 44.98,103.78 43.97,104.78 v43.97,104.87 | v49.27,100.64 49.87,100.64 54.54,105.31 59.06,105.31 59.28,105.09 | v31.84,111.08 32.05,111.08 R19.1 34.2,109.51 34.2,114.12 35.05,114.96 U2.9 | 59.28,105.09 59.28,105.11 v59.31,105.14 | 59.28,105.09 59.67,104.7 64.49,104.7 J3.8
  Bottom 0.203: v31.84,111.08 31.13,110.37 v31.13,108.1 | v35.63,106.1 42.65,106.1 43.88,104.87 v43.97,104.87 | v44.98,99.56 46.29,100.88 49.03,100.88 v49.27,100.64
INT_03  (via drill 0.51)
  Top 0.203: SX1509_3.9 35.05,85.26 33.7,83.91 32.55,82.76 R24.1 28.32,85.85 v28.77,86.3 | v25.15,82.95 24.55,82.95 22.45,85.06 22.45,86.42 v23.94,87.92 | v32.22,102.76 34.05,104.59 v37,104.59 | v58.64,119.51 60.5,117.65 v60.5,117.57 | v61.97,115.06 61.92,115 v61.92,112.5 | v47.57,119.31 47.57,117.24 41.22,110.89 41.22,105.09 v40.82,104.68
  Bottom 0.203: v28.77,86.3 28.5,86.3 v25.15,82.95 | v23.94,87.92 25.32,89.3 25.32,90.51 32.75,97.95 32.75,102.23 v32.22,102.76 | v37,104.59 37.1,104.68 v40.82,104.68 | v58.64,119.51 58.5,119.65 47.9,119.65 v47.57,119.31 | v60.5,117.57 61.97,116.11 v61.97,115.06 | v61.92,112.5 62.13,112.29 J3.14
N$5
  Top 0.203: JP6.2 36.58,108.46 R21.1
N$8
  Top 0.203: R13.1 32.12,41.96 JP8.2
N$13
  Top 0.203: R28.1 13.19,111.06 STATUS.1
N$14
  Top 0.203: JP10.2 R25.1
N$15
  Top 0.203: JP11.2 32.65,100.66 R26.1
N$193
  Top 0.203: R27.1 15.53,114.66 POWER_3.3.1
NEOPIXEL_01  (via drill 0.51)
  Top 0.203: M_01.3 65.8,12.72 65.28,13.24 64.86,13.66 64.86,15.45 64.86,15.95 64.24,16.57 63.61,17.2 63.61,18.73 58.93,23.42 46.75,23.42 45,25.17 45,34.5 42.95,36.55 v42.95,44.95 v42.96,44.95 | 59.28,82.16 v59.31,82.14 | v59.28,78.64 59.28,82.16 | 59.28,82.16
  Bottom 0.203: v42.96,44.95 42.96,55.05 59.05,71.14 59.06,71.16 59.17,71.26 59.22,71.32 59.22,78.64 v59.28,78.64 | v59.31,82.14 59.31,82.24 68.65,91.58 68.65,98.19 68.08,98.75 J3.1
NEOPIXEL_02  (via drill 0.51)
  Top 0.203: M_02.3 29.86,12.72 32.49,15.35 v32.49,16.24 | v44.83,60.1 44.76,60.03 v31.8,60.03
  Bottom 0.203: v44.83,60.1 52.48,67.75 52.48,74.06 69.05,90.64 69.05,101.32 J3.3 | v32.49,16.24 32.71,16.46 32.71,59.12 v31.8,60.03
NEOPIXEL_03  (via drill 0.51)
  Top 0.203: M_03.3 67.44,53.12 67.94,53.12 69.03,54.21 v69.03,54.99 | v56.16,65.38 53.12,68.41 v53.12,81.56
  Bottom 0.203: v69.03,54.99 58.64,65.38 v56.16,65.38 | v53.12,81.56 57.01,81.56 66.9,91.45 66.9,99.74 67.05,99.89 67.05,103.26 J3.5
NEOPIXEL_04  (via drill 0.51)
  Top 0.203: M_04.3 29.17,52.73 29.47,53.02 v29.67,53.23 | v43.63,61.39 43.43,61.19 33.05,61.19 v32.79,61.45 | J3.7 68.24,106.29 69.21,105.33 69.21,99.51 67.31,97.61 67.07,97.61 67.03,97.61 67.2,97.61 67.57,97.98 v67.71,97.98
  Bottom 0.203: v29.67,53.23 29.67,59.94 31.21,61.47 32.77,61.47 v32.79,61.45 | v43.63,61.39 51.59,69.35 51.59,75.57 68.24,92.22 68.24,97.45 v67.71,97.98
NEOPIXEL_05  (via drill 0.51)
  Top 0.203: M_05.3 69.49,92.73 v70.42,93.67 | J3.9 69.92,106.46 69.92,103.44 v70.27,103.09
  Bottom 0.203: v70.42,93.67 70.42,102.58 70.27,102.73 v70.27,103.09
NEOPIXEL_06  (via drill 0.51)
  Top 0.203: M_06.3 69.22,132.74 69.45,132.74 v69.91,132.28
  Bottom 0.203: v69.91,132.28 69.91,112.12 J3.11
NEOPIXEL_07  (via drill 0.51)
  Top 0.203: M_07.3 27.97,92.73 31.27,96.03 31.27,97.83 30.13,98.96 29.36,99.73 v29.36,101.82 | v46.03,117.71 45.88,117.55 43.09,120.34 43.09,129.64 v42.68,130.04 | v47.86,114.43 57.53,114.43 57.8,114.16 v58.8,114.16
  Bottom 0.203: v29.36,101.82 29.36,105.43 21.95,112.84 21.95,114.93 23.29,116.27 25.47,116.27 26.47,117.27 26.47,122.69 26.47,127.17 28.76,129.46 28.79,129.46 42.1,129.46 v42.68,130.04 | v58.8,114.16 64.86,114.16 65.68,113.33 67.05,113.33 J3.13 | v47.86,114.43 46.03,116.25 v46.03,117.71
NEOPIXEL_08  (via drill 0.51)
  Top 0.203: M_08.3 27.82,132.74 31,129.55 31,127.31 30.08,126.39 28.98,126.39 v28.8,126.56
  Bottom 0.203: J3.15 69.05,115.26 69.05,119.1 67.44,120.72 62.57,120.72 60.66,122.64 52.76,122.64 47.72,127.67 29.32,127.67 28.8,127.15 v28.8,126.56
SCL_00  (via drill 0.51)
  Top 0.203: R23.1 35.25,97.08 35.25,94.98 35.55,94.68 | U2.25 35.85,120.56 35.85,121.23 v36.27,121.65 36.29,121.65 36.7,122.06 36.7,123.36 R18.1 | v46.59,107.65 46.59,105.5 47.92,104.17 47.92,102.24 v47.95,102.21 | SX1509_2.25 35.85,37.82 34.16,39.52 v34.07,39.52 34.07,40.49 R11.1 | 35.55,94.68 35.85,94.38 SX1509_3.25 | 35.55,94.68 v35.52,94.68
  Bottom 0.203: v46.59,107.65 46.44,107.65 45.21,108.88 43.93,108.88 42.9,109.9 42.03,109.9 41.19,110.74 38.85,110.74 37.92,111.67 37.92,112.17 36.42,113.67 36.42,121.5 v36.27,121.65 | 47.97,102.27 48.17,102.08 65.87,102.08 J3.4 | 47.97,102.27 46.53,102.27 45.56,101.29 40.12,101.29 35.88,97.05 35.88,95.01 35.55,94.68 | v34.07,39.52 34.07,57.25 34.89,58.07 34.89,63.09 28.44,69.55 27.18,70.8 21.54,70.8 20.84,70.8 19.04,72.6 19.04,77.11 23.08,81.16 23.08,82.12 29.06,88.11 29.06,91.28 30.32,92.54 31.59,92.54 33,93.95 33.93,93.95 34.66,94.68 35.55,94.68 | 47.97,102.27 47.95,102.24 v47.95,102.21 | 35.55,94.68 v35.52,94.68
SDA_00  (via drill 0.51)
  Top 0.203: SX1509_3.24 36.25,92.25 36.25,94.18 v36.74,94.67 36.74,97.48 R20.1 37.13,97.29 | U2.24 36.25,120.41 37.49,121.65 37.74,121.65 v37.69,121.65 | v47.62,108.63 47.62,105.32 49.53,103.42 v50.16,103.42 | J3.2 65.36,99.57 62.45,99.57 60.06,101.96 55.53,101.96 54.47,103.03 v54.09,103.03 | R17.1 37.89,124.24 37.89,121.85 v37.69,121.65 | 36.25,36.76 SX1509_2.24 | 36.25,36.76 36.25,36.9 | R10.1 37.71,40.1 v37.71,39.31 37.71,38.94 36.57,37.79 36.25,37.48 36.25,36.76 | v37.69,121.65 | v48.49,83.33 46.89,84.92 v46.46,84.92
  Bottom 0.203: v47.62,108.63 46.05,108.63 45.39,109.29 44.09,109.29 43.07,110.31 42.2,110.31 41.36,111.14 39.02,111.14 38.33,111.83 38.33,112.34 37.75,112.92 36.83,113.84 36.83,120.79 v37.69,121.65 | v50.16,103.42 50.54,103.03 v54.09,103.03 | 41.7,100.89 45.72,100.89 46.13,101.29 48.18,101.29 48.55,101.66 64.72,101.66 J3.2 | 41.7,100.89 40.42,100.89 36.74,97.21 v36.74,94.67 | v37.71,39.31 41.95,43.55 41.95,68.46 48.49,74.99 v48.49,83.33 | 41.7,100.89 44.82,97.77 44.82,86.57 v46.46,84.92
VCC_5V  (via drill 0.51)
  Top 0.508: S1.8 S1.4 55.36,118.33 60.16,123.14 67.68,123.14 70.63,126.08 70.63,130.23 69.54,131.31 69.51,131.31 69.09,131.74 M_06.2 | S1.8 49.86,126.97 48,128.83 47.47,129.36 47.47,137.9 45.78,139.59 33.77,139.59 28.34,139.59 24.96,136.21 24.96,133.28 24.96,133.02 26.24,131.74 M_08.2 | S1.8 48.91,116.84 47.96,116.84 41.78,110.66 v41.78,97.06 v41.79,97.05 41.79,93.58 42.55,92.82 42.55,92.8 50.15,85.19 67.18,85.19 70.63,88.64 70.63,90.22 69.12,91.73 M_05.2 | M_04.2 35.14,51.73 v39.17,55.76 39.17,55.78 40.89,57.5 47.3,57.5 51.84,62.04 67.47,62.04 70.9,58.62 70.9,54.54 68.09,51.73 M_03.2 | M_02.2 26.98,11.74 32.96,11.74 34.77,9.93 38.16,9.93 v39.18,10.95 46.51,3.63 46.85,3.63 66.94,3.63 71,7.69 71,10.76 70.05,11.7 70.04,11.72 M_01.2 | M_07.2 v30.65,91.73 v30.66,91.73
  Bottom 0.508: 39.16,55.76 v39.17,55.76 | v41.78,97.06 41.35,96.63 41.35,91.69 | v39.17,55.76 39.17,61.21 34.31,66.07 34.31,80.11 36.75,82.56 38.18,82.56 42.18,86.56 42.18,90.87 41.35,91.69 | v39.18,10.95 39.18,14.16 36.32,17.02 36.32,52.91 v39.17,55.76 | v30.66,91.73 31.56,91.73 33.23,93.39 39.66,93.39 41.35,91.69
VCC_5V_IN
  Top 0.508: J3.17 69.32,116.29 70.57,117.54 70.57,120.03 69.11,121.49 65.87,121.49 60.16,115.78 58.04,115.78 S1.3 S1.7

## Text on the board
tPlace: gnd | gnd | 0 | 0 | 1 | 1 | GND | 3V | ON | 5V | GND | SX1509_1 | I2C | NEO | 2 | 2 | 3 | 3 | 4 | 4 | 5 | 5 | gnd | gnd | 6 | 6 | 7 | 7
bPlace: GND | 3V | 5V | I2C